# Altium PCB STRAIN.PcbDoc
Units mm, origin at the board's own origin, x right, y up, seen from the top; angles counter-clockwise.
Board outline 52.58 x 38.1 mm, 2 copper layers (Top Layer, Bottom Layer); 14 components, 34 nets, 51 pads, 8 vias.
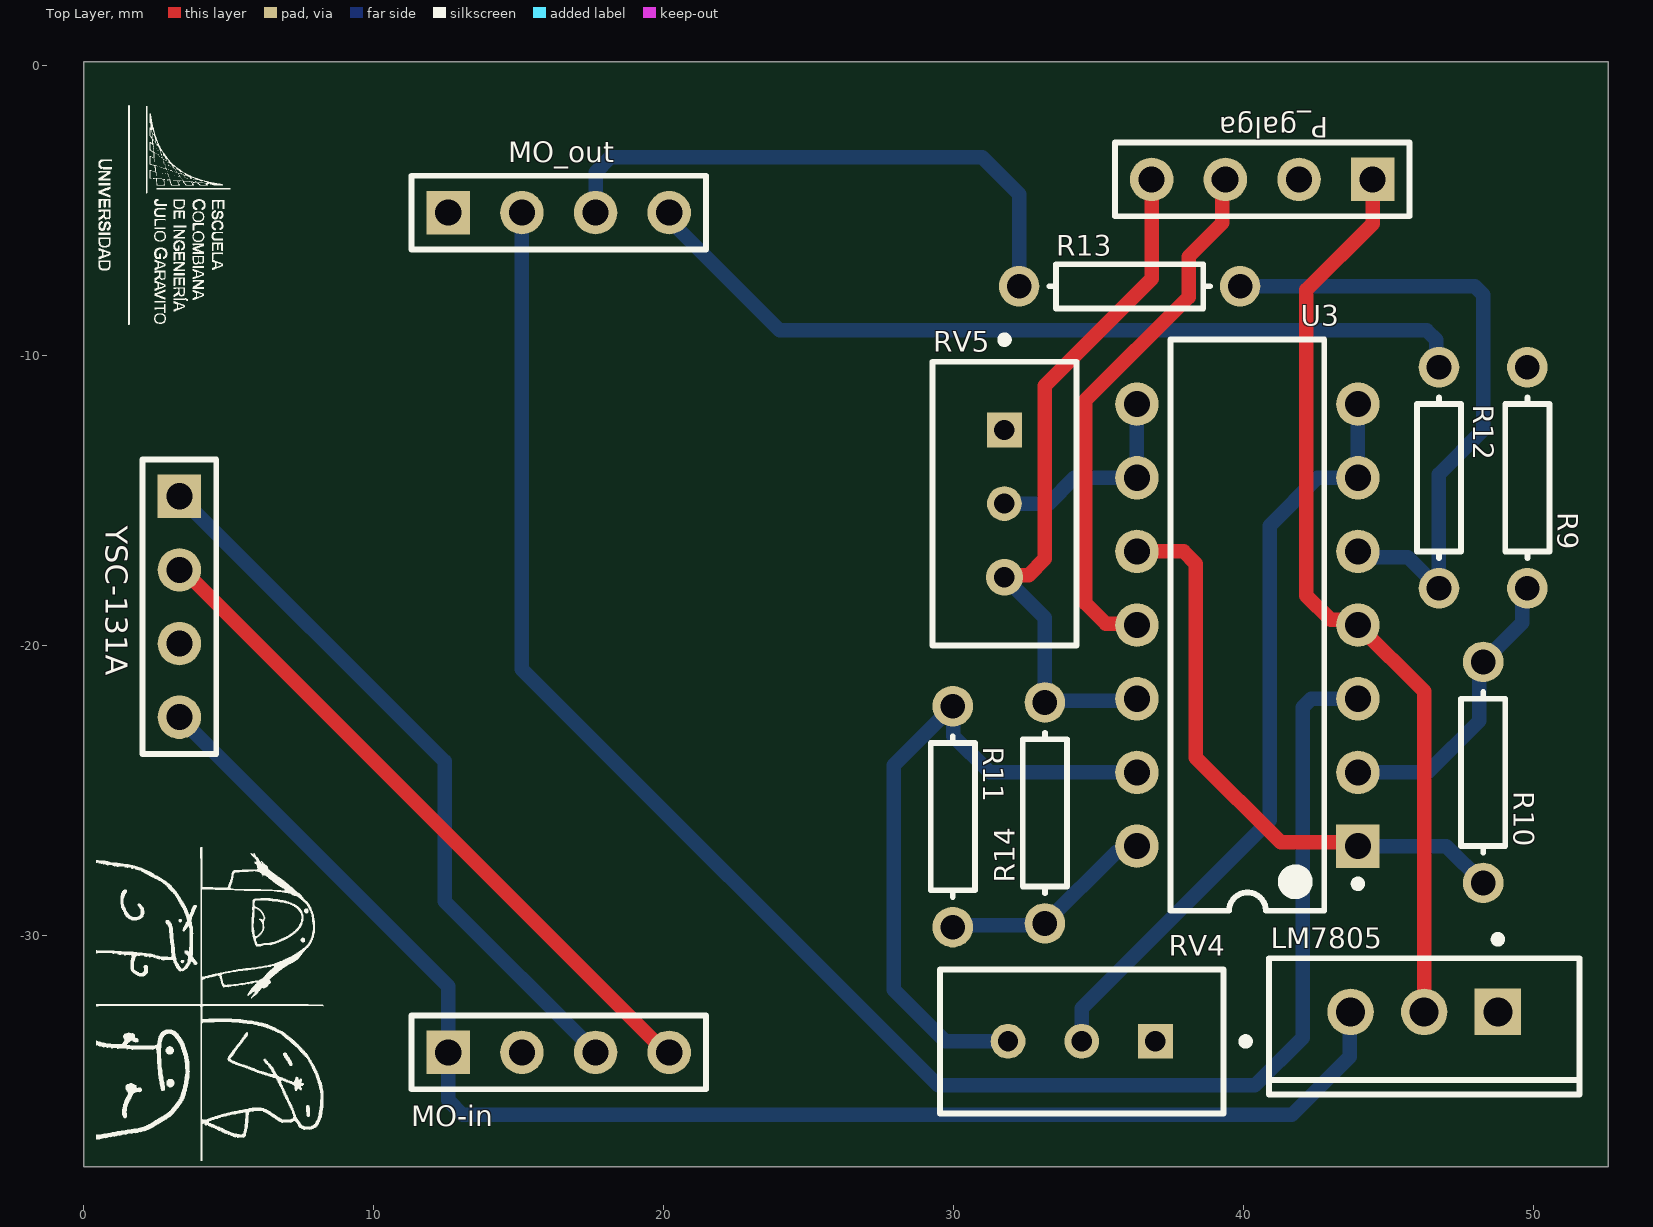
[diagram p0: Top Layer view]
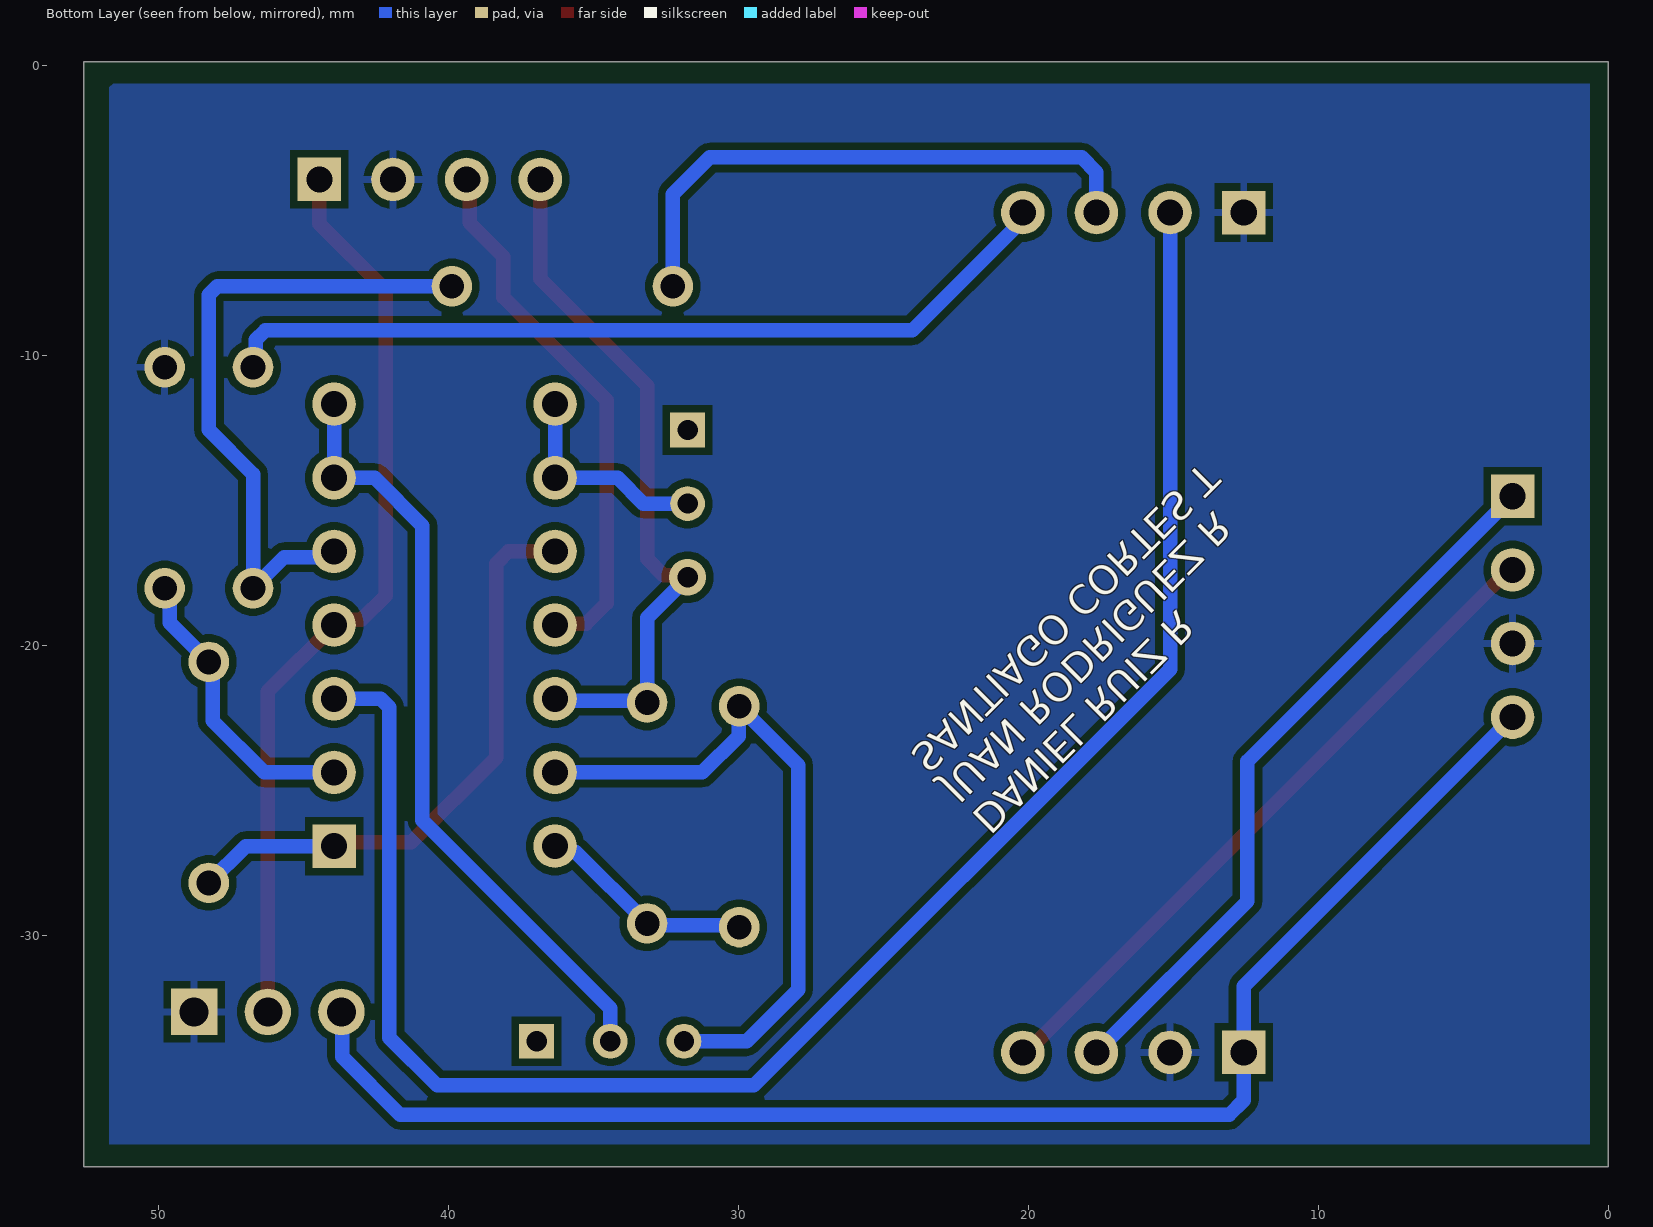
[diagram p1: Bottom Layer view, seen from below]

## Layer stack, top to bottom
Top Solder: solder mask 0.0102, Solder Resist, Dk 3.5
Top Layer: signal copper 0.0356
Dielectric 1: dielectric 0.32, FR-4, Dk 4.8
Bottom Layer: signal copper 0.0356
Bottom Solder: solder mask 0.0102, Solder Resist, Dk 3.5

## Board outline
0,-37.973 0,0.127 52.578,0.127 52.578,-37.973

## Design rules (kind name [scope] priority, off if disabled: settings)
Clearance Clearance_1 [All] p1: gap=0.25 ignorepadtopadclearanceinfootprint=FALSE
Clearance Clearance_GND [InNet('GND') vs InNet('GND')] p2: gap=0.25 ignorepadtopadclearanceinfootprint=FALSE
PlaneConnect [InNet('GND')] p1: planeconnectstyle=Relief reliefexpansion=0 reliefentries=4 reliefconductorwidth=0 reliefairgap=0.254
PolygonConnect [All] p1: connectstyle=Relief reliefconductorwidth=0.254 reliefentries=4 polygonreliefangle="90 Angle" airgapwidth=0.254
RoomDefinition [InComponentClass('STRAIN') vs False] p1: confinementstyle=ConfineIn formatcopy=TRUE lockcomponents=FALSE outline 0,-37.973 52.578,-37.973 52.578,0.127 0,0.127
RoutingTopology [All] p1: topology=Daisy_Balanced
RoutingVias [All] p1: holewidth=0.711 width=1.27 viastyle="Through Hole" minholewidth=0.711 minwidth=1.27 maxholewidth=0.711 maxwidth=1.27
SolderMaskExpansion [All] p1: expansion=0.102 istentingtop=FALSE
Width [All] p1: maxlimit=1 minlimit=0.254 preferedwidth=0.5
28 further rules are at their usual default settings.

## Components (designator, comment, footprint, x,y, rotation, side; value= is the part's Value field where it differs from the comment)
LM7805 "LM7905CT/NOPB" NDE0003A 46.228,-32.639 r180 top
MO-in "Header 4" HDR1X4 12.573,-34.036 r0 top
MO_out "Header 4" HDR1X4 12.573,-5.08 r0 top
P_galga "Header 4" HDR1X4 44.45,-3.937 r180 top
R9 "Res1" AXIAL-0.3 49.784,-14.224 r90 top value=1200
R10 "Res1" AXIAL-0.3 48.26,-24.384 r270 top value=10k
R11 "Res1" AXIAL-0.3 29.972,-25.908 r90 top value=330
R12 "Res1" AXIAL-0.3 46.736,-14.224 r90 top value=10k
R13 "Res1" AXIAL-0.3 36.068,-7.62 r0 top value=10k
R14 "Res1" AXIAL-0.3 33.147,-25.781 r270 top value=330
RV4 "3296W-1-504LF" FP-3296W-MFG 34.417,-33.66 r0 top value=725
RV5 "3296W-1-504LF" FP-3296W-MFG 31.755,-15.113 r90 top value=725
U3 "LF347N" N0014A 40.132,-19.304 r180 top
YSC-131A "Header 4" HDR1X4 3.302,-14.859 r270 top

## Footprints (in the part's own frame and the unit in brackets; to place one, negate y for a bottom-side part, rotate by r counter-clockwise, add the part's x,y. Pads: shape width x height; smd on the part's side, far side on the other; paste and mask are expansions set on the pad)
AXIAL-0.3 [mm] "Axial Device, Thru-Hole; 2 Leads; 0.3 in Pin Spacing"
  round 1.4 hole 0.85: 1(-3.81,0) 2(3.81,0)
  silkscreen extent -2.77,-0.76 2.77,0.76
FP-3296W-MFG [mm]
  rect 1.2x1.2 hole 0.7 paste-2539.97 mask+0: 1(2.54,0.005)
  round 1.2 hole 0.7 paste-2539.97 mask+0: 2(0,0.005) 3(-2.54,0.005)
  silkscreen extent -4.89,-2.48 5.77,2.48, body extent -4.99,-2.58 4.99,2.58, height 0.25
HDR1X4 [mm] "Connector; Header; 4 Position"
  rect 1.5x1.5 hole 0.9: 1(0,0)
  round 1.5 hole 0.9: 2(2.54,0) 3(5.08,0) 4(7.62,0)
  silkscreen extent -1.27,-1.27 8.89,1.27
N0014A [mm] "DIP, 14-Leads, Body 19.7x6.6mm, Pitch 2.54mm"
  rect 1.5x1.5 hole 0.9: 1(-3.81,7.62)
  round 1.5 hole 0.9: 2(-3.81,5.08) 3(-3.81,2.54) 4(-3.81,0) 5(-3.81,-2.54) 6(-3.81,-5.08) 7(-3.81,-7.62) 8(3.81,-7.62) 9(3.81,-5.08) 10(3.81,-2.54) 11(3.81,0) 12(3.81,2.54) 13(3.81,5.08) 14(3.81,7.62)
  silkscreen extent -3.94,-9.85 2.65,9.85, body extent -3.95,-9.85 3.95,9.85, height 5.08
NDE0003A [mm] "FM, 3-Leads, Body 10.7x4.7mm, Pitch 2.54mm"
  rect 1.6x1.6 hole 1: 1(-2.54,0)
  round 1.6 hole 1: 2(0,0) 3(2.54,0)
  silkscreen extent -5.35,-2.62 5.35,2.85, body extent -5.4,-1.9 5.4,2.9, height 19.4

## Part data
LM7805: library part CMP-0062-02481-3, "3-Terminal Negative Regulator, 3-pin TO-220, Pb-Free", Manufacturer="Texas Instruments", PackageTopMarking=NSUZXYTTE#*LM7905CT, PowerWise=N, ComponentLink1Description="Datasheet URL", ComponentLink1URL=http://www.ti.com/general/docs/lit/getliterature.tsp?genericPartNumber=LM7905&fileType=pdf, CompType="LDO IC", PackageDescription="TO-220, Molded, 3 Lead, Straight", PackageReference=NDE0003A, PinCount=3, RoHS=Y
MO-in MO_out P_galga YSC-131A: "Header, 4-Pin", LatestRevisionDate=17-Jul-2002, LatestRevisionNote="Re-released for DXP Platform.", Publisher="Altium Limited"
R9 R10 R11 R12 R13 R14: "Resistor", LatestRevisionDate=17-Jul-2002, LatestRevisionNote="Re-released for DXP Platform.", PackageDescription="Axial Device, Thru-Hole; 2 Leads; 0.3 in Pin Spacing", PackageReference=AXIAL-0.3, Published=8-Jun-2000, Publisher="Altium Limited"
RV4 RV5: library part CMP-2000-05583-2, "TRIMMER 500K OHM 0.5W PC PIN TOP", Manufacturer=Bourns, Package=3296W, Power Rating=0.5W, Resistance=1k, Temperature="-55°C to +125°C", Temperature Coefficient=100ppm/°C, Temperature Range High=+125°C, Temperature Range Low=-55°C, Tolerance=10%, Voltage Rating=300V, Automotive=No, Category=Res, ComponentLink2Description=Datasheet, ComponentLink2URL=https://www.bourns.com/docs/Product-Datasheets/3296.pdf, Device Class L1="Passive Components", Device Class L2=Resistors, Device Class L3="Variable Resistors and Potentiometers", Digikey Description="TRIMMER 500K OHM 0.5W PC PIN TOP", Height=12.05mm, Lead Free=Yes, Manufacturer Part Number=3296W-1-504LF, Mouser Description="Trimmer; Cermet; Rest 500 Kilohms; PCB; 25 Turns; Pwr-Rtg 0.5W", Octopart=https://octopart.com/3296w-1-504lf-bourns-143884, RoHS=TRUE, Series="Trimpot 3296-Sealed", Standoff Height=0.38mm
U3: library part CMP-0055-00229-3, "Wide Bandwidth Quad JFET Input Operational Amplifier, 14-pin MDIP", Manufacturer="Texas Instruments", Package Reference=N0014A, PackageTopMarking=NSUZXYYTTE#*LF347N, PowerWise=N, Code_JEDEC=MS-001-AA, ComponentLink1Description="Datasheet URL", ComponentLink1URL=http://www.ti.com/general/docs/lit/getliterature.tsp?genericPartNumber=LF347&fileType=pdf, CompType=Amplifiers, PackageDescription="MDIP, .750 x .250 x.130in, 14 Lead, .100in Pitch", PinCount=14, RoHS=N

## Via types
v1: diameter 1.27, hole 0.711, Top Layer to Bottom Layer, 8 vias

## Nets (pads, with @x,y where several pads share a name; then routed paths per layer and width w, separated by ;. In a path a pad name is that pad's centre, name@x,y a point inside that pad or via, vN(x,y) a via of type N, cw(c..) or ccw(c..) an arc to the next point about the centre after c; other vN are vias at no path point)
GND: LM7805.1 MO-in.2 MO_out.1 P_galga.2 R9.2 YSC-131A.3
NetC1_1: 
NetC2_2: 
NetC5_1: 
NetC6_2: 
NetD1_2: 
NetD3_2: 
NetIN/OUT_1: 
NetLM7805_3: LM7805.3 MO-in.1 YSC-131A.4 | length 50.7
  Bottom Layer w0.5: YSC-131A.4 12.573,-31.75 MO-in.1 12.573,-35.687 13.081,-36.195 41.656,-36.195 43.662,-34.189 43.662,-32.665 LM7805.3
NetMO-in_3: MO-in.3 YSC-131A.1 | length 25.1
  Bottom Layer w0.5: YSC-131A.1 12.446,-24.003 12.446,-28.829 MO-in.3
NetMO-in_4: MO-in.4 YSC-131A.2 | length 23.8
  Top Layer w0.5: v1(3.302,-17.399) 3.429,-17.399 20.066,-34.036 v1(20.193,-34.036)
NetMO_out_2: MO_out.2 U3.3 | length 62.7
  Bottom Layer w0.5: MO_out.2 15.113,-20.828 29.464,-35.179 40.386,-35.179 42.037,-33.528 42.037,-22.137 42.33,-21.844 U3.3
NetMO_out_3: MO_out.3 R13.1 | length 19.9
  Bottom Layer w0.5: MO_out.3 17.653,-3.683 18.161,-3.175 30.988,-3.175 32.258,-4.445 R13.1
NetMO_out_4: MO_out.4 R12.2 | length 29.4
  Bottom Layer w0.5: MO_out.4 20.193,-5.334 24.003,-9.144 46.316,-9.144 46.636,-9.464 46.636,-10.314 R12.2
NetNTC_1: 
NetNTC_2: 
NetP_galga_4: P_galga.4 R14.1 RV5.3 U3.12 | length 24.4
  Top Layer w0.5: v1(31.75,-17.653) 31.824,-17.579 32.586,-17.579 33.147,-17.018 33.147,-11.049 36.83,-7.366 P_galga.4
  Bottom Layer w0.5: v1(31.75,-17.653) 33.147,-19.05 R14.1 33.21,-21.907 36.258,-21.907 U3.12
NetR2_1: 
NetR3_1: 
NetR3_2: 
NetR4_2: 
NetR5_1: 
NetR6_1: 
NetR7_1: 
NetR9_1: R9.1 R10.1 U3.2 | length 10.2
  Bottom Layer w0.5: U3.2 46.355,-24.384 48.133,-22.606 48.133,-20.701 R10.1 49.612,-19.222 49.612,-18.206 R9.1
NetR10_2: R10.2 U3.1 U3.10 | length 20.6
  Top Layer w0.5: v1(36.322,-16.764) 37.934,-16.764 38.354,-17.184 38.354,-23.876 41.275,-26.797 43.815,-26.797 v1(43.942,-26.924)
  Bottom Layer w0.5: v1(43.942,-26.924) 46.99,-26.924 R10.2
NetR11_1: R11.1 R14.2 U3.14 | length 7.5
  Bottom Layer w0.5: R11.1 30.035,-29.654 33.084,-29.654 R14.2 35.623,-27.115 36.131,-27.115 U3.14
NetR11_2: R11.2 RV4.3 U3.13 | length 23.2
  Bottom Layer w0.5: RV4.3 29.718,-33.655 27.94,-31.877 27.94,-24.13 R11.2 29.989,-22.115 29.989,-23.131 31.242,-24.384 U3.13
NetR12_1: R12.1 R13.2 U3.5 | length 22.6
  Bottom Layer w0.5: R13.2 47.967,-7.62 48.26,-7.913 48.26,-12.573 46.736,-14.097 R12.1 45.657,-16.955 44.133,-16.955 U3.5
NetRV3_2: 
NetRV4_2: RV4.2 U3.6 U3.7 | length 26.7
  Bottom Layer w0.5: RV4.2 34.417,-32.512 40.894,-26.035 40.894,-15.875 42.545,-14.224 U3.6 U3.7
NetRV5_2: RV5.2 U3.8 U3.9 | length 7.5
  Bottom Layer w0.5: RV5.2 33.274,-15.113 34.163,-14.224 U3.9 U3.8
VCC: LM7805.2 P_galga.1 U3.4 | length 31.8
  Top Layer w0.5: P_galga.1 44.45,-5.461 42.164,-7.747 42.164,-18.288 43,-19.124 43.762,-19.124 v1(43.942,-19.304) 46.228,-21.59 v1(46.228,-32.639)
VDD: P_galga.3 U3.11 | length 18.8
  Top Layer w0.5: U3.11 36.269,-19.251 35.253,-19.251 34.544,-18.542 34.544,-11.557 38.1,-8.001 38.1,-6.604 39.267,-5.437 39.267,-3.961 v1(39.243,-3.937)
  Bottom Layer w0.5: v1(39.243,-3.937) P_galga.3
pads on no net: RV4.1 RV5.1

## Polygon pours and split planes (outlines as drawn)
GND on Bottom Layer "GND" (solid, pour order 0): 0.635,-0.635 0.635,-37.211 51.689,-37.211 51.689,-0.762 51.562,-0.635

## Silkscreen, mask and mechanical layers (free items; w line width, h text height)
Top Overlay:
  drawing of 72 lines, arcs and shapes, not listed
Bottom Overlay:
  text "DANIEL RUIZ R / JUAN RODRIGUEZ R / SANTIAGO CORTES T" at 24.13,-23.749 h1 r135
Mechanical 1:
  the board outline again, w0.254

## Dimensions
21.463,-35.306 to 27.94,-35.306 on Mechanical 1
2.032,-23.749 to 0,-37.973 on Mechanical 1
2.032,-23.749 to 2.032,-13.589 on Mechanical 1
0,-37.973 to 52.578,-37.973 on Mechanical 1
52.578,0.127 to 52.578,-37.973 on Mechanical 1
21.463,-35.306 to 21.463,-3.81 on Mechanical 1
5.842,-0.889 to 27.94,-0.889 on Mechanical 1
5.842,-1.397 to 11.398,-4.806 on Mechanical 1
21.59,-4.445 to 27.94,-1.397 on Mechanical 1